# Altium PCB LCD_Keypad.PcbDoc
Units mm, origin at the board's own origin, x right, y up, seen from the top; angles counter-clockwise.
Board outline 99.95 x 99.95 mm, 2 copper layers (Top Layer, Bottom Layer); 16 components, 34 nets, 145 pads, 0 vias.
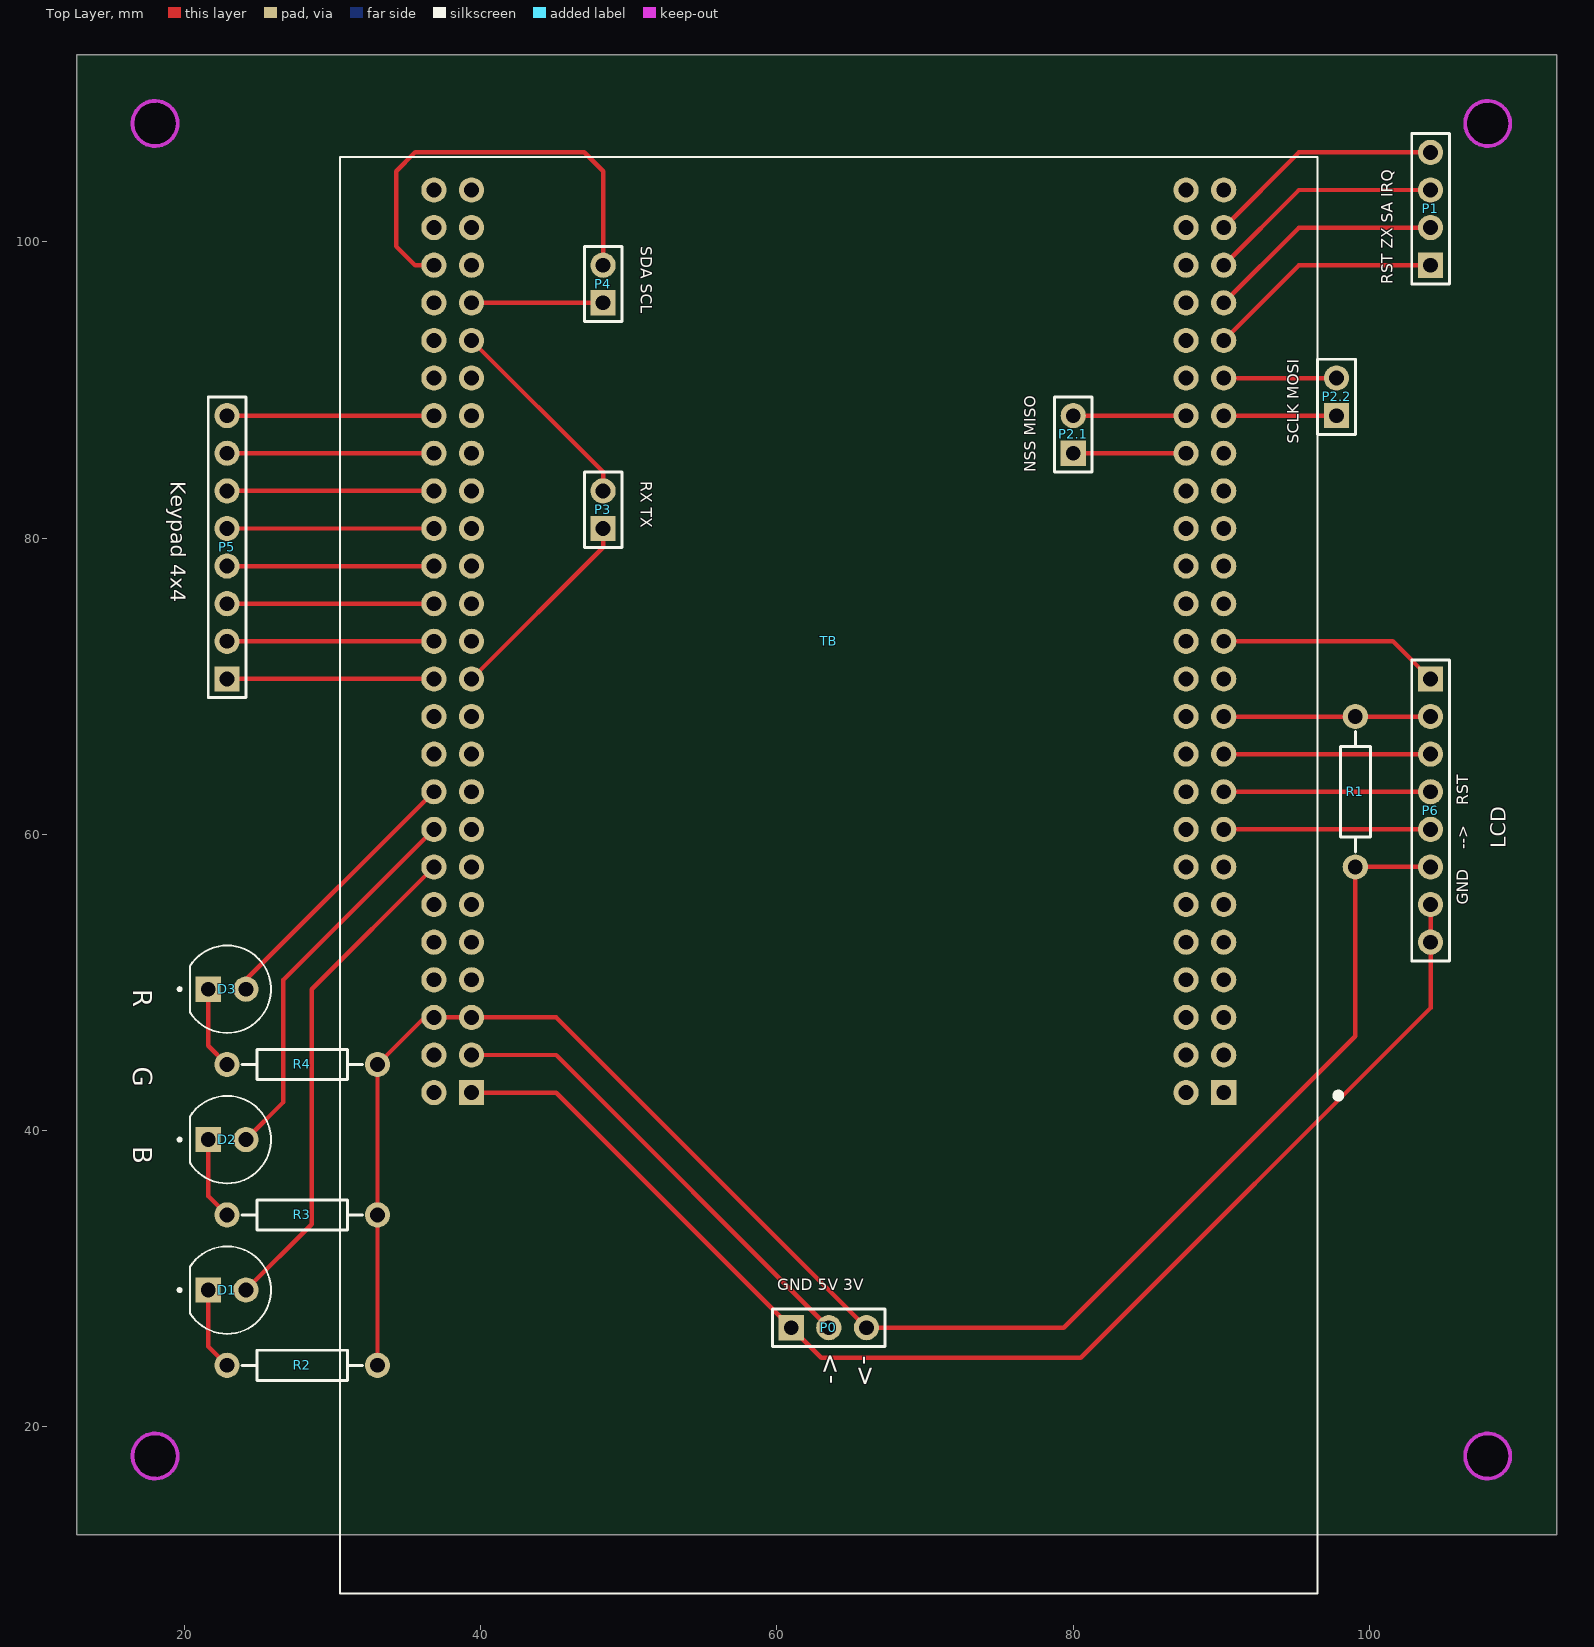
[diagram p0: Top Layer view]
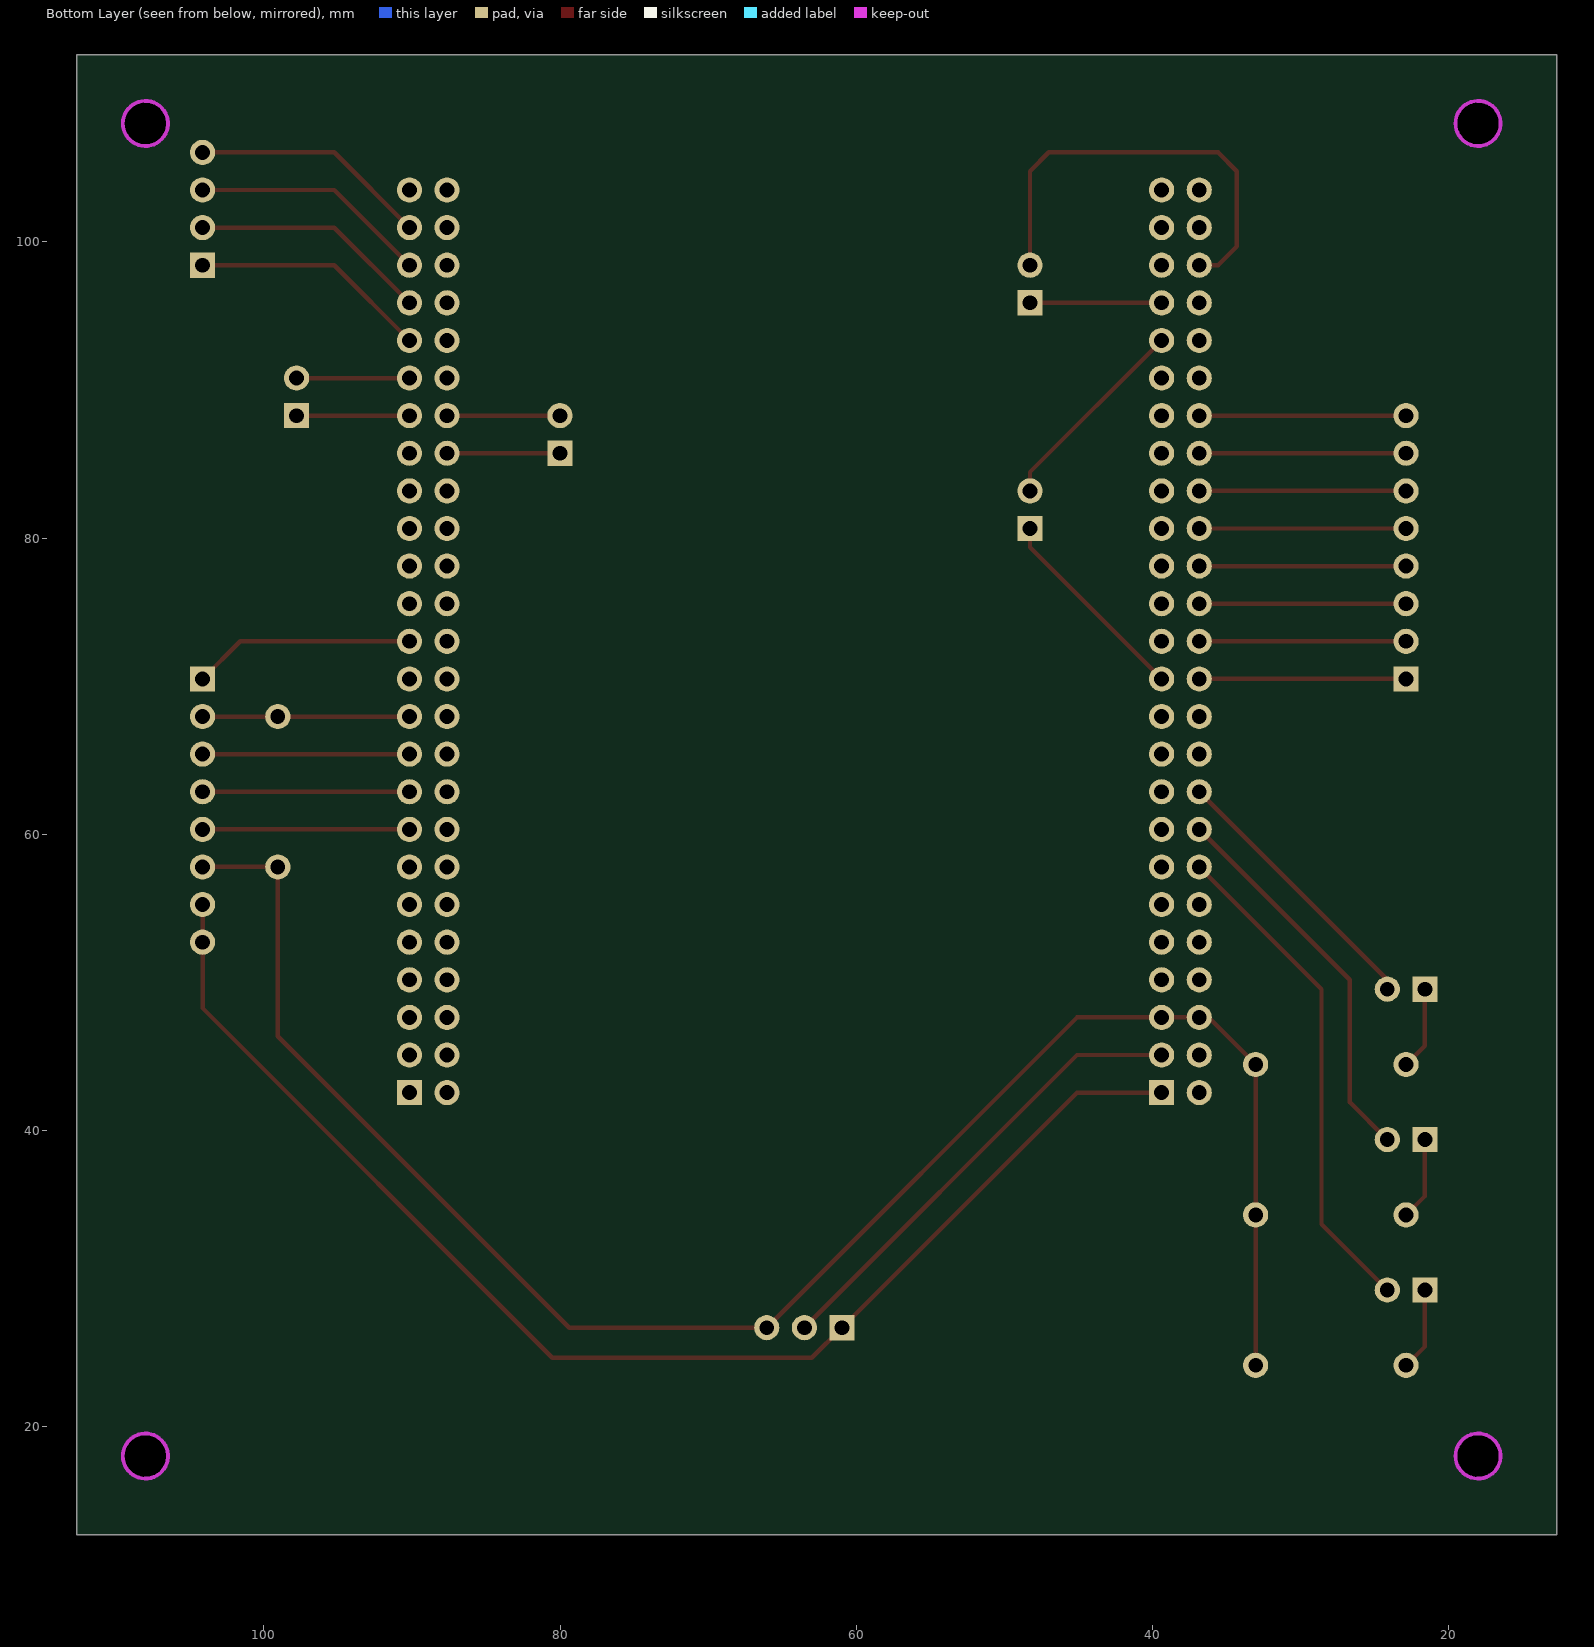
[diagram p1: Bottom Layer view, seen from below]

## Layer stack, top to bottom
Top Solder: solder mask 0.0102, Solder Resist, Dk 3.5
Top Layer: signal copper 0.0356
Dielectric 1: dielectric 0.32, FR-4, Dk 4.8
Bottom Layer: signal copper 0.0356
Bottom Solder: solder mask 0.0102, Solder Resist, Dk 3.5

## Board outline
12.7,12.7 112.649,12.7 112.649,112.649 12.7,112.649
cut-out: 18,16.475 cw(c18,18) 16.475,18 cw(c18,18) 18,19.525 cw(c18,18) 19.525,18 cw(c18,18)
cut-out: 106.475,18 ccw(c108,18) 108,16.475 ccw(c108,18) 109.525,18 ccw(c108,18) 108,19.525 ccw(c108,18)
cut-out: 108,106.475 cw(c108,108) 106.475,108 cw(c108,108) 108,109.525 cw(c108,108) 109.525,108 cw(c108,108)
cut-out: 18,106.475 cw(c18,108) 16.475,108 cw(c18,108) 18,109.525 cw(c18,108) 19.525,108 cw(c18,108)

## Design rules (kind name [scope] priority, off if disabled: settings)
Clearance [All] p1: gap=0.254 ignorepadtopadclearanceinfootprint=FALSE except(0: Arc-Hole Track-Hole SMDPad-Hole THPad-Hole Via-Hole Fill-Hole Poly-Hole Region-Hole Text-Hole)
ComponentClearance [All] p1: gap=0 collisioncheckmode=3 verticalgap=0 showdistances=FALSE
PolygonConnect [All] p1: connectstyle=Relief reliefconductorwidth=0.254 reliefentries=4 polygonreliefangle="90 Angle" airgapwidth=0.254
RoutingVias [All] p1: holewidth=0.711 width=1.27 viastyle="Through Hole" minholewidth=0.711 minwidth=1.27 maxholewidth=0.711 maxwidth=1.27
SolderMaskExpansion [All] p1: expansion=0.102
Width [All] p1: maxlimit=0.5 minlimit=0.3 preferedwidth=0.3
29 further rules are at their usual default settings.

## Components (designator, comment, footprint, x,y, rotation, side; value= is the part's Value field where it differs from the comment)
D1 "L08R5000Q1" LEDRD254W57D500H1070 22.86,29.21 r0 top
D2 "L08R5000Q1" LEDRD254W57D500H1070 22.86,39.37 r0 top
D3 "L08R5000Q1" LEDRD254W57D500H1070 22.86,49.53 r0 top
P0 "JMP" HDR1X3 60.96,26.67 r0 top
P1 "ADE_EX" HDR1X4 104.14,98.425 r90 top
P2.1 "ADE_SPI" HDR1X2 80.01,85.725 r90 top
P2.2 "ADE_SPI" HDR1X2 97.79,88.265 r90 top
P3 "ESP" HDR1X2 48.26,80.645 r90 top
P4 "DS1307" HDR1X2 48.26,95.885 r90 top
P5 "Keypad 4x4" HDR1X8 22.86,70.485 r90 top
P6 "LCD" HDR1X8 104.14,70.485 r270 top
R1 "Res2" AXIAL-0.4 99.06,62.865 r270 top value=4K7
R2 "Res2" AXIAL-0.4 27.94,24.13 r180 top value=470
R3 "Res2" AXIAL-0.4 27.94,34.29 r180 top value=470
R4 "Res2" AXIAL-0.4 27.94,44.45 r180 top value=470
TB "STM32F4DISCOVERY" MODULE_STM32F4DISCOVERY 63.5,57.225 r180 top

## Footprints (in the part's own frame and the unit in brackets; to place one, negate y for a bottom-side part, rotate by r counter-clockwise, add the part's x,y. Pads: shape width x height; smd on the part's side, far side on the other; paste and mask are expansions set on the pad)
AXIAL-0.4 [mm] "Axial Device, Thru-Hole; 2 Leads; 0.4 in Pin Spacing"
  round 1.7 hole 1: 1(-5.08,0) 2(5.08,0)
  silkscreen extent -4.06,-1.02 4.06,1.02
HDR1X2 [mm] "Connector; Header; 2 Position"
  rect 1.7x1.7 hole 1: 1(0,0)
  round 1.7 hole 1: 2(2.54,0)
  silkscreen extent -1.27,-1.27 3.81,1.27
HDR1X3 [mm] "Connector; Header; 3 Position"
  rect 1.7x1.7 hole 1: 1(0,0)
  round 1.7 hole 1: 2(2.54,0) 3(5.08,0)
  silkscreen extent -1.27,-1.27 6.35,1.27
HDR1X4 [mm] "Connector; Header; 4 Position"
  rect 1.7x1.7 hole 1: 1(0,0)
  round 1.7 hole 1: 2(2.54,0) 3(5.08,0) 4(7.62,0)
  silkscreen extent -1.27,-1.27 8.89,1.27
HDR1X8 [mm] "Connector; Header; 8 Position"
  rect 1.7x1.7 hole 1: 1(0,0)
  round 1.7 hole 1: 2(2.54,0) 3(5.08,0) 4(7.62,0) 5(10.16,0) 6(12.7,0) 7(15.24,0) 8(17.78,0)
  silkscreen extent -1.27,-1.27 19.05,1.27
LEDRD254W57D500H1070 [mm]
  round 1.7 hole 1: A(1.27,0)
  rect 1.7x1.7 hole 1: C(-1.27,0)
  silkscreen extent -3.3,-2.96 2.96,2.96
MODULE_STM32F4DISCOVERY [mm]
  rect 1.7x1.7 hole 1: P1_1(-26.67,14.68) P2_1(24.13,14.68)
  round 1.7 hole 1: P1_2(-24.13,14.68) P1_3(-26.67,12.14) P1_4(-24.13,12.14) P1_5(-26.67,9.6) P1_6(-24.13,9.6) P1_7(-26.67,7.06) P1_8(-24.13,7.06) P1_9(-26.67,4.52) P1_10(-24.13,4.52) P1_11(-26.67,1.98) P1_12(-24.13,1.98) P1_13(-26.67,-0.56) P1_14(-24.13,-0.56) P1_15(-26.67,-3.1) P1_16(-24.13,-3.1) P1_17(-26.67,-5.64) P1_18(-24.13,-5.64) P1_19(-26.67,-8.18) P1_20(-24.13,-8.18) P1_21(-26.67,-10.72) P1_22(-24.13,-10.72) P1_23(-26.67,-13.26) P1_24(-24.13,-13.26) P1_25(-26.67,-15.8) P1_26(-24.13,-15.8) P1_27(-26.67,-18.34) P1_28(-24.13,-18.34) P1_29(-26.67,-20.88) P1_30(-24.13,-20.88) P1_31(-26.67,-23.42) P1_32(-24.13,-23.42) P1_33(-26.67,-25.96) P1_34(-24.13,-25.96) P1_35(-26.67,-28.5) P1_36(-24.13,-28.5) P1_37(-26.67,-31.04) P1_38(-24.13,-31.04) P1_39(-26.67,-33.58) P1_40(-24.13,-33.58) P1_41(-26.67,-36.12) P1_42(-24.13,-36.12) P1_43(-26.67,-38.66) P1_44(-24.13,-38.66) P1_45(-26.67,-41.2) P1_46(-24.13,-41.2) P1_47(-26.67,-43.74) P1_48(-24.13,-43.74) P1_49(-26.67,-46.28) P1_50(-24.13,-46.28) P2_2(26.67,14.68) P2_3(24.13,12.14) P2_4(26.67,12.14) P2_5(24.13,9.6) P2_6(26.67,9.6) P2_7(24.13,7.06) P2_8(26.67,7.06) P2_9(24.13,4.52) P2_10(26.67,4.52) P2_11(24.13,1.98) P2_12(26.67,1.98) P2_13(24.13,-0.56) P2_14(26.67,-0.56) P2_15(24.13,-3.1) P2_16(26.67,-3.1) P2_17(24.13,-5.64) P2_18(26.67,-5.64) P2_19(24.13,-8.18) P2_20(26.67,-8.18) P2_21(24.13,-10.72) P2_22(26.67,-10.72) P2_23(24.13,-13.26) P2_24(26.67,-13.26) P2_25(24.13,-15.8) P2_26(26.67,-15.8) P2_27(24.13,-18.34) P2_28(26.67,-18.34) P2_29(24.13,-20.88) P2_30(26.67,-20.88) P2_31(24.13,-23.42) P2_32(26.67,-23.42) P2_33(24.13,-25.96) P2_34(26.67,-25.96) P2_35(24.13,-28.5) P2_36(26.67,-28.5) P2_37(24.13,-31.04) P2_38(26.67,-31.04) P2_39(24.13,-33.58) P2_40(26.67,-33.58) P2_41(24.13,-36.12) P2_42(26.67,-36.12) P2_43(24.13,-38.66) P2_44(26.67,-38.66) P2_45(24.13,-41.2) P2_46(26.67,-41.2) P2_47(24.13,-43.74) P2_48(26.67,-43.74) P2_49(24.13,-46.28) P2_50(26.67,-46.28)
  silkscreen extent -34.61,-48.5 33,48.5

## Part data
D1 D2 D3: "LED, Orange, Through Hole, T-1 3/4 (5mm), 30 mA, 2.1 V, 635 nm", Package=None, Availability=Unavailable, MF="{'manufacturer': u'LED Technology'}", MP=L08R5000Q1, Price=None
P0: library part "Header 3", "Header, 3-Pin", LatestRevisionDate=17-Jul-2002, LatestRevisionNote="Re-released for DXP Platform.", Publisher="Altium Limited"
P1: library part "Header 4", "Header, 4-Pin", LatestRevisionDate=17-Jul-2002, LatestRevisionNote="Re-released for DXP Platform.", Publisher="Altium Limited"
P2.1 P2.2 P3 P4: library part "Header 2", "Header, 2-Pin", LatestRevisionDate=17-Jul-2002, LatestRevisionNote="Re-released for DXP Platform.", Publisher="Altium Limited"
P5 P6: library part "Header 8", "Header, 8-Pin", LatestRevisionDate=17-Jul-2002, LatestRevisionNote="Re-released for DXP Platform.", Publisher="Altium Limited"
R1 R2 R3 R4: "Resistor", LatestRevisionDate=17-Jul-2002, LatestRevisionNote="Re-released for DXP Platform.", PackageDescription="Axial Device, Thru-Hole; 2 Leads; 0.4 in Pin Spacing", PackageReference=AXIAL-0.4, Published=8-Jun-2000, Publisher="Altium Limited"
TB: "STM32F407VGT6 Discovery STM32F4 ARM® Cortex®-M4 MCU 32-Bit Embedded Evaluation Board", Package=None, Availability=Unavailable, MF=STMicroelectronics, MP=STM32F4DISCOVERY, Price=None, SnapEDA_Link=https://www.snapeda.com/parts/STM32F4DISCOVERY/STMicroelectronics/view-part/46335/?ref=snap

## Nets (pads, with @x,y where several pads share a name; then routed paths per layer and width w, separated by ;. In a path a pad name is that pad's centre, name@x,y a point inside that pad or via, vN(x,y) a via of type N, cw(c..) or ccw(c..) an arc to the next point about the centre after c; other vN are vias at no path point)
+3: P0.3 P6.6 R1.2 R2.1 R3.1 R4.1 TB.P2_5 TB.P2_6 | length 121
  Top Layer w0.3: R2.1 R3.1 R4.1 36.195,47.625 TB.P2_6 TB.P2_5 45.085,47.625 P0.3 79.375,26.67 99.06,46.355 R1.2 P6.6
+5: P0.2 TB.P2_3 | length 31.8
  Top Layer w0.3: TB.P2_3 45.085,45.085 P0.2
ADE_CLK: P2.2.1 TB.P1_37 | length 7.6
  Top Layer w0.3: TB.P1_37 P2.2.1
ADE_IRQ: P1.1 TB.P1_41 | length 16.1
  Top Layer w0.3: TB.P1_41 95.25,98.425 P1.1
ADE_MISO: P2.1.2 TB.P1_38 | length 7.6
  Top Layer w0.3: P2.1.2 TB.P1_38
ADE_MOSI: P2.2.2 TB.P1_39 | length 7.6
  Top Layer w0.3: TB.P1_39 P2.2.2
ADE_NSS: P2.1.1 TB.P1_36 | length 7.6
  Top Layer w0.3: P2.1.1 TB.P1_36
ADE_RST: P1.4 TB.P1_47 | length 16.1
  Top Layer w0.3: TB.P1_47 95.25,106.045 P1.4
ADE_SAG: P1.2 TB.P1_43 | length 16.1
  Top Layer w0.3: TB.P1_43 95.25,100.965 P1.2
ADE_ZX: P1.3 TB.P1_45 | length 16.1
  Top Layer w0.3: TB.P1_45 95.25,103.505 P1.3
C1: P5.4 TB.P2_30 | length 14
  Top Layer w0.3: P5.4 TB.P2_30
C2: P5.3 TB.P2_28 | length 14
  Top Layer w0.3: P5.3 TB.P2_28
C3: P5.2 TB.P2_26 | length 14
  Top Layer w0.3: P5.2 TB.P2_26
C4: P5.1 TB.P2_24 | length 14
  Top Layer w0.3: P5.1 TB.P2_24
GND: P0.1 P6.7 P6.8 TB.P2_1 | length 89
  Top Layer w0.3: TB.P2_1 45.085,42.545 P0.1 62.992,24.638 80.518,24.638 104.14,48.26 P6.8 P6.7
LCD_CE: P6.2 R1.1 TB.P1_21 | length 14
  Top Layer w0.3: TB.P1_21 P6.2
LCD_DC: P6.3 TB.P1_19 | length 14
  Top Layer w0.3: TB.P1_19 P6.3
LCD_DIN: P6.4 TB.P1_17 | length 14
  Top Layer w0.3: TB.P1_17 P6.4
LCD_RST: P6.1 TB.P1_25 | length 15
  Top Layer w0.3: TB.P1_25 101.6,73.025 P6.1
LCD_SCLK: P6.5 TB.P1_15 | length 14
  Top Layer w0.3: TB.P1_15 P6.5
NetD1_A: D1.A TB.P2_14 | length 33.8
  Top Layer w0.3: D1.A 28.575,33.655 28.575,49.53 TB.P2_14
NetD1_C: D1.C R2.2 | length 5.6
  Top Layer w0.3: D1.C 21.59,25.4 R2.2
NetD2_A: D2.A TB.P2_16 | length 26.2
  Top Layer w0.3: D2.A 26.67,41.91 26.67,50.165 TB.P2_16
NetD2_C: D2.C R3.2 | length 5.6
  Top Layer w0.3: D2.C 21.59,35.56 R3.2
NetD3_A: D3.A TB.P2_18 | length 18.6
  Top Layer w0.3: D3.A 24.13,50.165 TB.P2_18
NetD3_C: D3.C R4.2 | length 5.6
  Top Layer w0.3: D3.C 21.59,45.72 R4.2
R1: P5.8 TB.P2_38 | length 14
  Top Layer w0.3: P5.8 TB.P2_38
R2: P5.7 TB.P2_36 | length 14
  Top Layer w0.3: P5.7 TB.P2_36
R3: P5.6 TB.P2_34 | length 14
  Top Layer w0.3: P5.6 TB.P2_34
R4: P5.5 TB.P2_32 | length 14
  Top Layer w0.3: P5.5 TB.P2_32
RX: P3.2 TB.P2_41 | length 13.8
  Top Layer w0.3: TB.P2_41 48.26,84.455 P3.2
SCL: P4.1 TB.P2_43 | length 8.9
  Top Layer w0.3: TB.P2_43 P4.1
SDA: P4.2 TB.P2_46 | length 29.5
  Top Layer w0.3: TB.P2_46 35.56,98.425 34.29,99.695 34.29,104.775 35.56,106.045 46.99,106.045 48.26,104.775 P4.2
TX: P3.1 TB.P2_23 | length 13.8
  Top Layer w0.3: TB.P2_23 48.26,79.375 P3.1
pads on no net: TB.P1_1 TB.P1_2 TB.P1_3 TB.P1_4 TB.P1_5 TB.P1_6 TB.P1_7 TB.P1_8 TB.P1_9 TB.P1_10 TB.P1_11 TB.P1_12 TB.P1_13 TB.P1_14 TB.P1_16 TB.P1_18 TB.P1_20 TB.P1_22 TB.P1_23 TB.P1_24 TB.P1_26 TB.P1_27 TB.P1_28 TB.P1_29 TB.P1_30 TB.P1_31 TB.P1_32 TB.P1_33 TB.P1_34 TB.P1_35 TB.P1_40 TB.P1_42 TB.P1_44 TB.P1_46 TB.P1_48 TB.P1_49 TB.P1_50 TB.P2_2 TB.P2_4 TB.P2_7 TB.P2_8 TB.P2_9 TB.P2_10 TB.P2_11 TB.P2_12 TB.P2_13 TB.P2_15 TB.P2_17 TB.P2_19 TB.P2_20 TB.P2_21 TB.P2_22 TB.P2_25 TB.P2_27 TB.P2_29 TB.P2_31 TB.P2_33 TB.P2_35 TB.P2_37 TB.P2_39 TB.P2_40 TB.P2_42 TB.P2_44 TB.P2_45 TB.P2_47 TB.P2_48 TB.P2_49 TB.P2_50

## Keep-outs
Keep-Out Layer:
  circle w0.254: c18,18 r1.525
  circle w0.254: c18,108 r1.525
  circle w0.254: c108,18 r1.525
  circle w0.254: c108,108 r1.525

## Silkscreen, mask and mechanical layers (free items; w line width, h text height)
Top Overlay:
  text "SDA SCL" at 50.8,99.695 h0.76 r270
  text "RST ZX SA IRQ" at 101.6,97.155 h0.76 r90
  text "SCLK MOSI" at 95.25,86.36 h0.76 r90
  text "NSS MISO" at 77.47,84.455 h0.76 r90
  text "RX TX" at 50.8,83.82 h0.76 r270
  text "GND    -->    RST" at 106.68,55.245 h0.76 r90
  text "R       G       B" at 16.51,49.53 h1.27 r270
  text "GND 5V 3V" at 60.008,29.21 h0.76
  text "->" at 65.405,24.765 h1.27 r270
  text "->" at 64.135,22.86 h1.27 r90